# EAGLE board L_B_block_base (EAGLE 9.6.2)
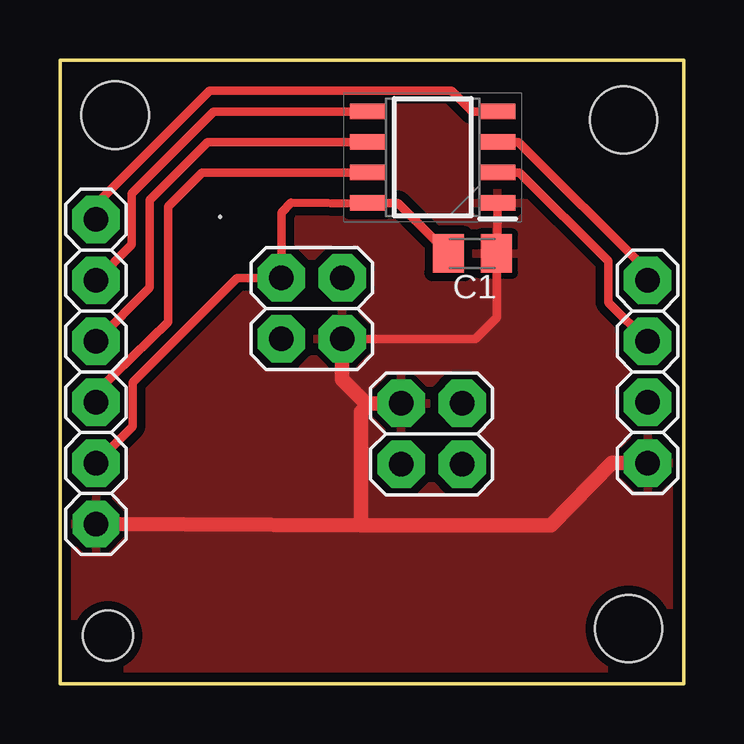
[diagram p0: board, top side]
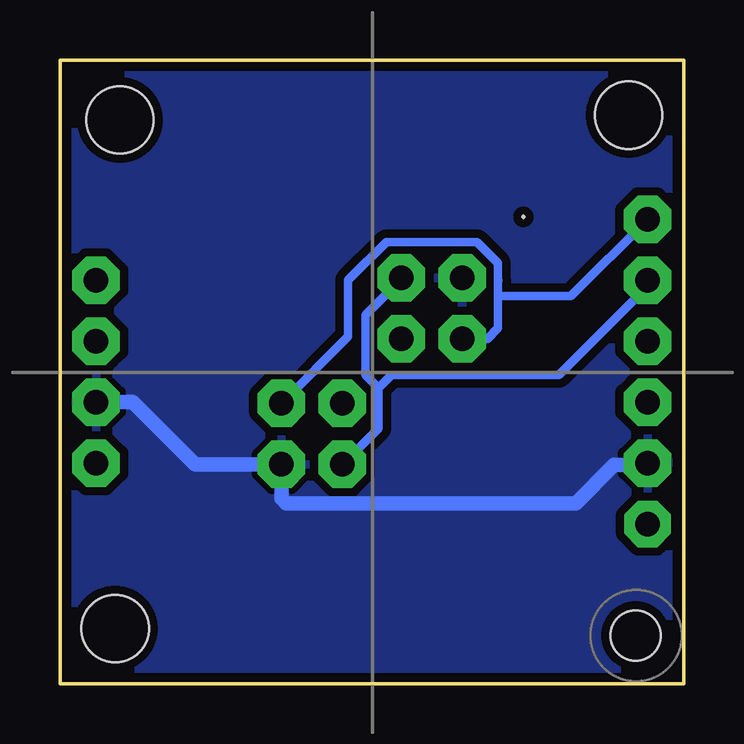
[diagram p1: board, bottom side, seen from below]

Size 26 x 26 mm. Coordinates in mm from the lower left corner, seen from the top.
Outline: 0,0 0,26 26,26 26,0 0,0
Copper layers (1*16): Top 0.035mm / dielectric 1.5mm / Bottom 0.035mm
Design rules "default *": minimum track width 14mil, minimum drill 0.35mm, track to track 14mil, track to pad 13mil, pad to pad 14mil, via to via 14mil, smd to smd 14mil, copper to edge 15mil, drill to drill 40mil, minimum pad ring 10mil, minimum via ring 8mil, stop-mask expansion 4mil, vias tented up to drill 0mil, thermal gap 10mil
Holes 2.1 mm at 2,2
Holes 2.8 mm at 23.5,23.5 23.7,2.3 2.3,23.7
Holes 0.08 mm at 6.68,19.46

## Footprints (pad centres in the part's own frame; a part is rotated, then mirrored left to right if it is on the bottom)
C0805K = smd 1.3 x 1.6: 1 -1,0; 2 1,0
SOIC127P600X175-8N = smd 1.5 x 0.65: 1 -2.7,1.905; 2 -2.7,0.635; 3 -2.7,-0.635; 4 -2.7,-1.905; 5 2.7,-1.905; 6 2.7,-0.635; 7 2.7,0.635; 8 2.7,1.905
1X04 = drill 1.016 pad 1.981 octagon: 1 -3.81,0; 2 -1.27,0; 3 1.27,0; 4 3.81,0
1X06 = drill 1.016 pad 1.93 octagon: 1 -6.35,0 | drill 1.016 pad 1.981 octagon: 2 -3.81,0; 3 -1.27,0; 4 1.27,0; 5 3.81,0; 6 6.35,0
2X02 = drill 1.016 pad 1.981 octagon: 1 -1.27,-1.27; 2 -1.27,1.27; 3 1.27,-1.27; 4 1.27,1.27

## Placement (x,y rotation side)
C1  [C0805K]  17.2,17.93 180 top
IC1  ATTINY412-SSN  [SOIC127P600X175-8N]  15.54,21.95 180 top
JP1  [1X04]  24.5,13 270 top
JP2  [1X06]  1.5,13 90 top
JP3  [2X02]  15.49,10.41 270 top
JP4  [2X02]  10.5,15.64 270 top

## Library data of the parts
C1 = rcl; SPICEPREFIX: C
IC1 = ATTINY412-SSN; DESCRIPTION: 8-bit Microcontrollers - MCU 20MHz, 4KB, SOIC8, Ind 105C, Green, Tube; HEIGHT: 1.75mm; MANUFACTURER_NAME: Microchip; MANUFACTURER_PART_NUMBER: ATTINY412-SSN; MOUSER_PART_NUMBER: 579-ATTINY412-SSN; MOUSER_PRICE-STOCK: https://www.mouser.co.uk/ProductDetail/Microchip-Technology/ATTINY412-SSN?qs=3HJ2avRr9PItQG9ZsCamPQ%3D%3D
JP1-JP4 = pinhead2

## Nets
GND: C1.2 IC1.8 JP1.3 JP2.2 JP3.4 JP4.1
P0: IC1.2 JP1.2
P1: IC1.3 JP1.1
P4: IC1.7 JP2.3
SCL: IC1.5 JP2.5 JP3.3 JP4.2
SDA: IC1.4 JP2.6 JP3.2 JP4.3
UPDI: IC1.6 JP2.4
VDD: C1.1 IC1.1 JP1.4 JP2.1 JP3.1 JP4.4

## Tracks (layer width: path | path; a pad name or v marks a point on that pad's centre or on a via)
GND
  Top 0.356: 12.82,20.02 9.64,20.04 9.23,19.63 JP4.1 7.38,16.91 3.02,12.56 3.02,10.71 JP2.2 | C1.2 14.09,20.04 IC1.8
  Top 0.61: IC1.8 12.82,20.02
  Bottom 0.61: JP1.3 22.96,11.73 20.37,9.14 JP3.4 16.76,7.71 16.57,7.52 4.48,7.52 2.9,9.11 1.54,9.11 JP2.2
  pour Bottom: 0,26 0,0 26,0 26,26
P0
  Top 0.356: JP1.2 22.87,15.9 22.87,17.62 19.16,21.31 IC1.2
P1
  Top 0.356: IC1.3 19.12,22.58 24.5,17.2 JP1.1
P4
  Top 0.356: JP2.3 1.5,12.16 4.51,15.07 4.51,19.89 5.93,21.31 IC1.7
SCL
  Top 0.356: 12.8,23.8 IC1.5 6.41,23.85 3,20.44 3,18.31 JP2.5
  Bottom 0.356: JP4.2 11.77,16.87 13.27,15.37 13.27,12.86 12.72,12.32 | JP3.3 12.72,10.64 12.72,12.32 | 12.72,12.32 12.17,12.87 5.21,12.87 1.5,16.58 JP2.5
SDA
  Top 0.356: JP2.6 1.5,19.99 6.23,24.72 16.32,24.72 17.2,23.85 IC1.4
  Bottom 0.356: 7.73,16.79 7.73,17.53 8.61,18.41 12.39,18.41 13.98,16.82 13.98,14.47 JP3.2 | 7.73,16.79 7.73,16.29 | 7.73,16.29 7.73,14.82 8.18,14.37 JP4.3 | 7.71,16.81 7.73,16.79 | JP2.6 4.69,16.16 7.6,16.16 7.73,16.29
UPDI
  Top 0.356: JP2.4 3.73,16.5 3.73,20.16 6.17,22.58 IC1.6
VDD
  Top 0.356: IC1.1 18.24,18.11 | JP4.4 17.32,14.37 18.21,15.27 18.21,17.68 18.2,17.69 C1.1
  Top 0.61: 18.24,18.11 18.21,18.08 18.21,17.68 | 11.77,14.42 JP4.4 11.77,12.67 12.76,11.68 JP3.1 12.9,11.68 12.55,11.33 12.55,6.6 | JP2.1 12.55,6.6 | 12.55,6.6 20.47,6.6 23.01,9.19 JP1.4
  pour Top: 0,26 0,0 26,0 26,26

## Text on the board
bDocu: SDA | SCL | P1 | UPDI | P4 | P0 | GND | GND | VCC | VCC